# Altium PCB Peripheralboard2.PcbDoc
Units mil, origin at the board's own origin, x right, y up, seen from the top; angles counter-clockwise.
Board outline 3346.46 x 3346.46 mil, 2 copper layers (Top Layer, Bottom Layer); 19 components, 17 nets, 154 pads, 14 vias.
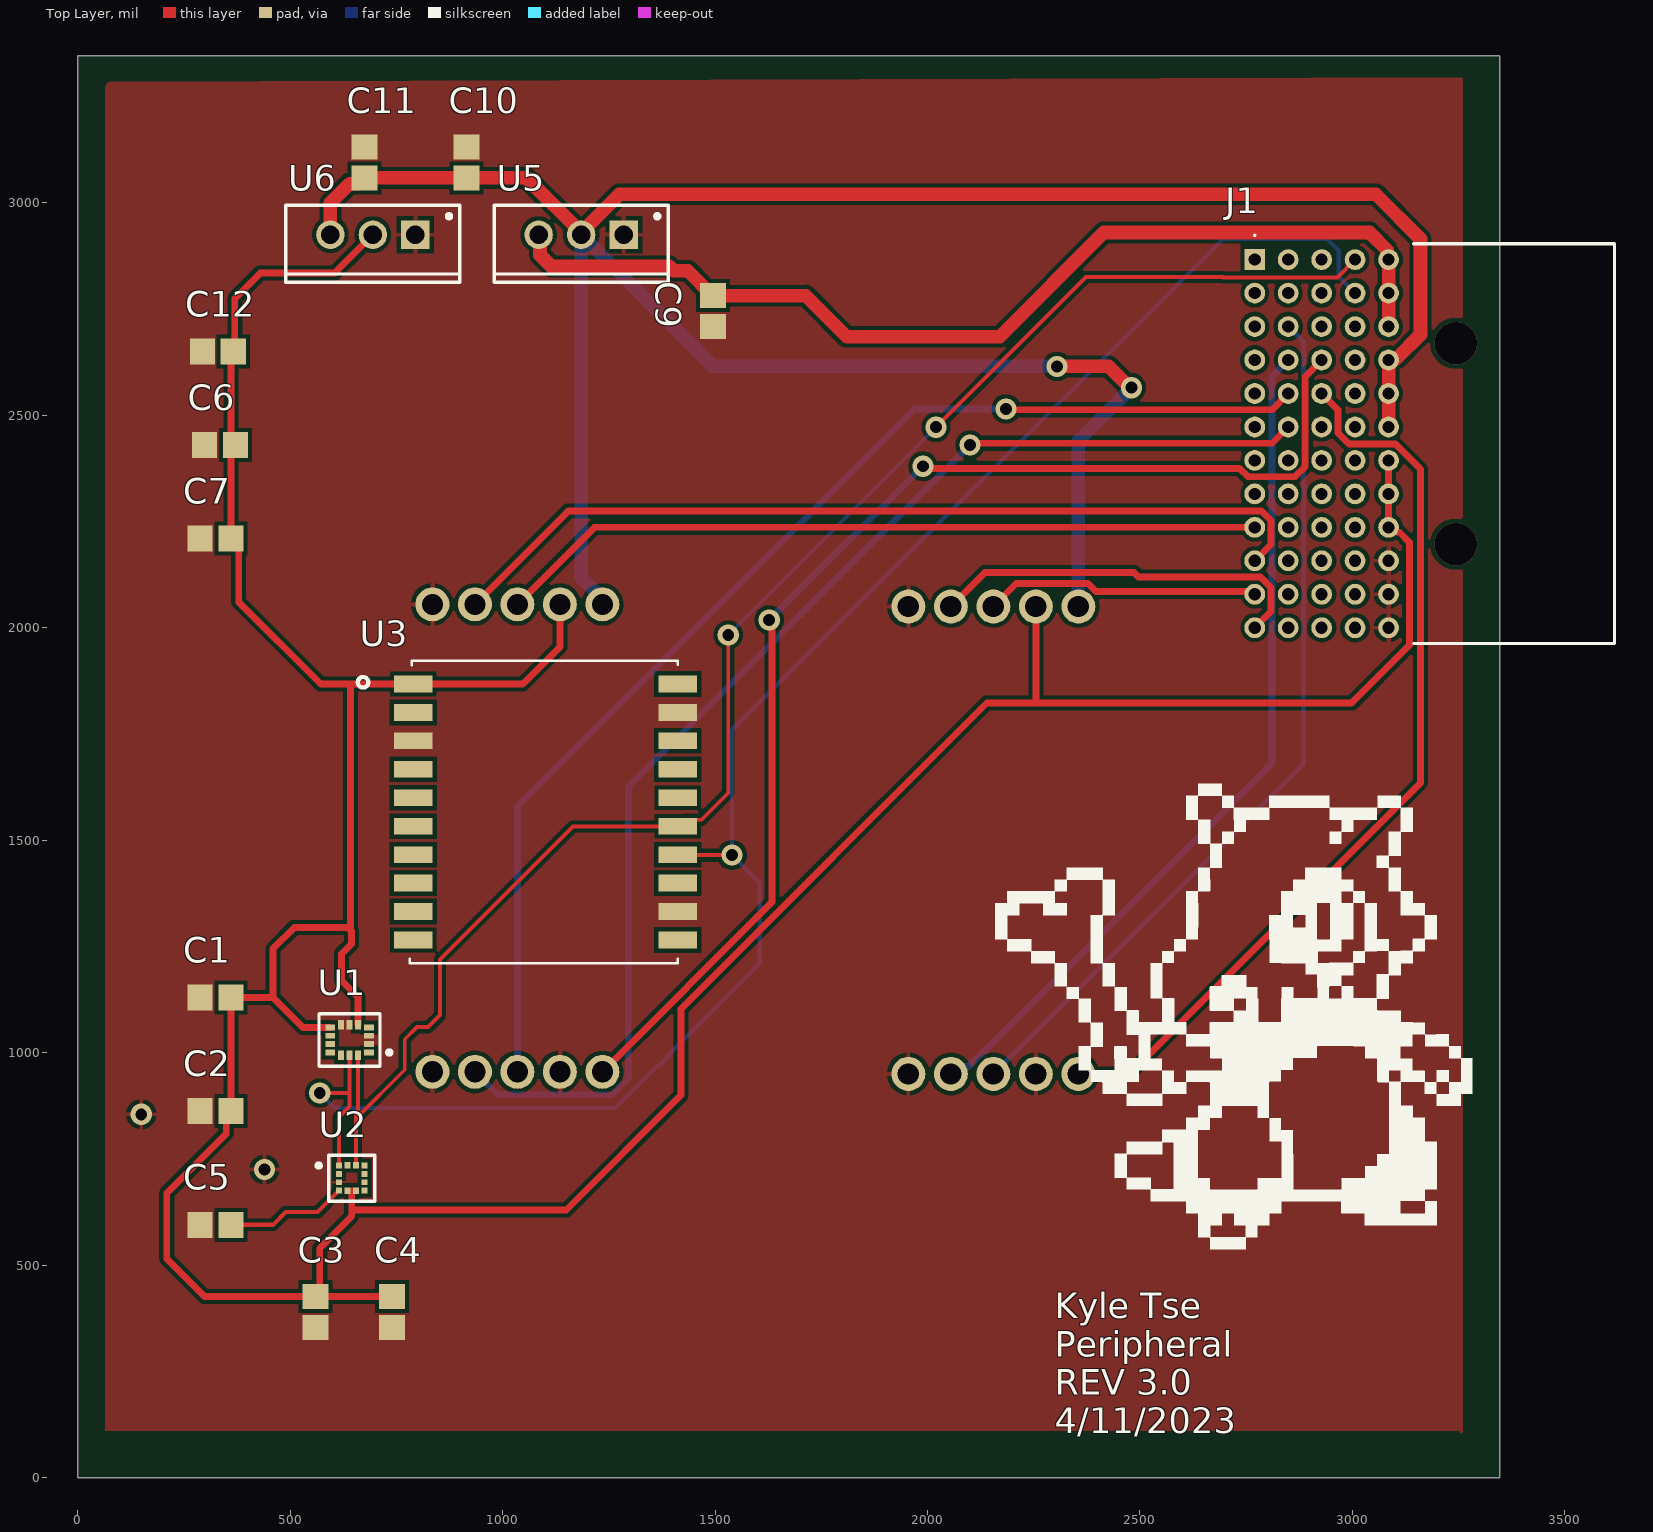
[diagram p0: Top Layer view]
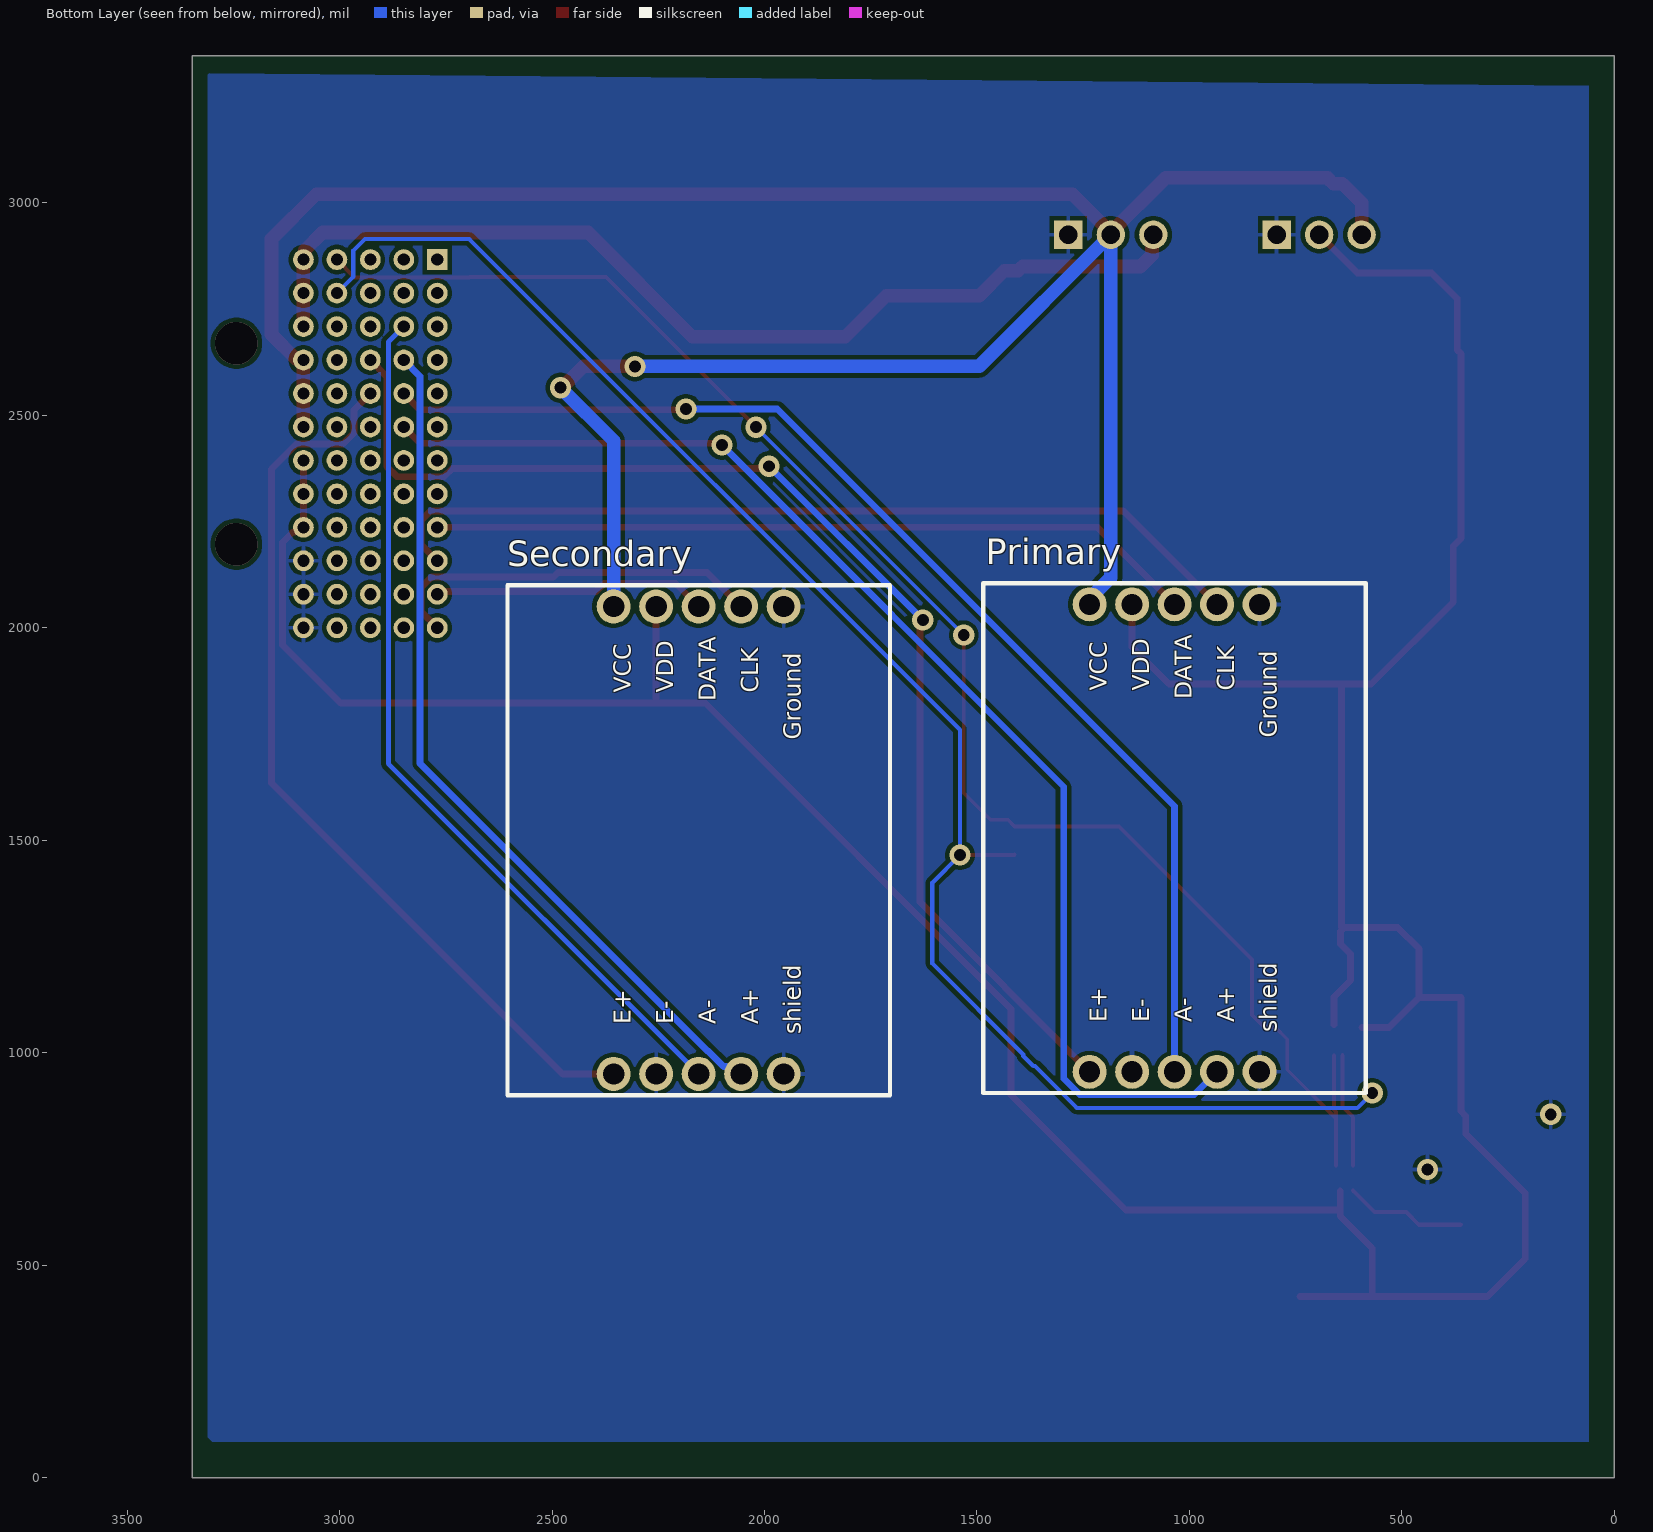
[diagram p1: Bottom Layer view, seen from below]

## Layer stack, top to bottom
Top Solder: solder mask 0.4, Solder Resist, Dk 3.5
Top Layer: signal copper 1.4
Dielectric 1: dielectric 12.6, FR-4, Dk 4.8
Bottom Layer: signal copper 1.4
Bottom Solder: solder mask 0.4, Solder Resist, Dk 3.5

## Board outline
0,0 0,3346.46 3346.46,3346.46 3346.46,0

## Design rules (kind name [scope] priority, off if disabled: settings)
Clearance [All] p1: gap=10 ignorepadtopadclearanceinfootprint=FALSE except(0: Arc-Hole Track-Hole SMDPad-Hole THPad-Hole Via-Hole Fill-Hole Poly-Hole Region-Hole Text-Hole; 3.94: Arc-SMDPad Track-SMDPad; 5.91: Arc-THPad Track-THPad SMDPad-SMDPad SMDPad-THPad THPad-THPad; 7.87: SMDPad-Text THPad-Text)
MinimumSolderMaskSliver [All] p1: minsoldermaskwidth=5.51
PolygonConnect [All] p1: thpad.connectstyle=Relief thpad.reliefconductorwidth=10 thpad.reliefentries=4 thpad.polygonreliefangle="90 Angle" thpad.airgapwidth=10 smdpad.connectstyle=Direct smdpad.reliefconductorwidth=10 smdpad.reliefentries=4 smdpad.polygonreliefangle="90 Angle" smdpad.airgapwidth=10 via.connectstyle=Relief via.reliefconductorwidth=10 via.reliefentries=4 via.polygonreliefangle="90 Angle" via.airgapwidth=10
RoutingVias [All] p1: holewidth=28 width=50 viastyle="Through Hole" minholewidth=28 minwidth=50 maxholewidth=28 maxwidth=50
SolderMaskExpansion [All] p1: expansion=4 istentingtop=FALSE
Width [All] p1: maxlimit=32 minlimit=9.21 preferedwidth=10 minimp=50.000000 maximp=50.000000 favimp=50.000000
29 further rules are at their usual default settings.

## Classes and differential pairs
component class Amplifier: Primary Secondary
component class UniConnector: J1
component class PA1616D: C6 C7 U3
component class CurrentSensor: C9 C10 C11 C12 U5 U6
component class 3+6axis: C1 C2 C3 C4 C5 U1 U2

## Components (designator, comment, footprint, x,y, rotation, side; value= is the part's Value field where it differs from the comment)
C1 "1uF" CAPC2013X145X48ML20T23 325,1130 r180 top
C2 ".1uF" CAPC2013X145X48ML20T23 325,862.5 r180 top
C3 "1uF" CAPC2013X145X48ML20T23 560,390 r270 top
C4 ".1uF" CAPC2013X145X48ML20T23 740,390 r270 top
C5 ".1uF" CAPC2013X145X48ML20T23 325,595 r0 top
C6 "1uF" CAPC2013X145X48ML20T23 335,2430 r180 top
C7 ".1uF" CAPC2013X145X48ML20T23 325,2210 r180 top
C9 "10uF" CAPC2013X145X48ML20T23 1495,2745 r270 top
C10 "10uF" CAPC2013X145X48ML20T23 915,3095 r90 top
C11 "10uF" CAPC2013X145X48ML20T23 675,3095 r90 top
C12 "10uF" CAPC2013X145X48ML20T23 330,2650 r180 top
J1 "5223004-2" 52230042 2770.04,2866.22 r90 top locked
Primary "hx711" PCBComponent_1 585,905 r90 bottom
Secondary "hx711" PCBComponent_1 1705,900 r90 bottom
U1 "LSM6DSOXTR" FP-LGA-14L-DM00249496-MFG 640,1030 r180 top
U2 "LIS3MDLTR" FP-VFLGA-12-8365767-MFG 645,705 r0 top
U3 "PA1616D" PA1616D 738.82,1241.73 r0 top
U5 "LD1117V50" TO220 1185,2925 r180 top
U6 "LD1117V33" TO220 695,2925 r180 top

## Footprints (in the part's own frame and the unit in brackets; to place one, negate y for a bottom-side part, rotate by r counter-clockwise, add the part's x,y. Pads: shape width x height; smd on the part's side, far side on the other; paste and mask are expansions set on the pad)
52230042 [mm]
  rect 1.243x1.243 hole 0.725: A1(0,0)
  round 1.243 hole 0.725: A2(-2,0) A3(-4,0) A4(-6,0) A5(-8,0) A6(-10,0) A7(-12,0) A8(-14,0) A9(-16,0) A10(-18,0) A11(-20,0) A12(-22,0) B1(0,-2) B2(-2,-2) B3(-4,-2) B4(-6,-2) B5(-8,-2) B6(-10,-2) B7(-12,-2) B8(-14,-2) B9(-16,-2) B10(-18,-2) B11(-20,-2) B12(-22,-2) C1(0,-4) C2(-2,-4) C3(-4,-4) C4(-6,-4) C5(-8,-4) C6(-10,-4) C7(-12,-4) C8(-14,-4) C9(-16,-4) C10(-18,-4) C11(-20,-4) C12(-22,-4) D1(0,-6) D2(-2,-6) D3(-4,-6) D4(-6,-6) D5(-8,-6) D6(-10,-6) D7(-12,-6) D8(-14,-6) D9(-16,-6) D10(-18,-6) D11(-20,-6) D12(-22,-6) E1(0,-8) E2(-2,-8) E3(-4,-8) E4(-6,-8) E5(-8,-8) E6(-10,-8) E7(-12,-8) E8(-14,-8) E9(-16,-8) E10(-18,-8) E11(-20,-8) E12(-22,-8)
  silkscreen extent -22.94,-21.5 1.5,0.05
CAPC2013X145X48ML20T23 [mm] "Chip Capacitor, 2-Leads, Body 2.00x1.25mm, IPC Low Density"
  rect 1.5x1.55 smd: 1(-0.925,0) 2(0.925,0)
  body extent -1.1,-0.72 1.1,0.72, height 1.45
FP-LGA-14L-DM00249496-MFG [mm]
  rect 0.575x0.35 smd paste+0 mask+0: 1(-1.162,0.75) 2(-1.162,0.25) 3(-1.162,-0.25) 4(-1.162,-0.75) 8(1.162,-0.75) 9(1.162,-0.25) 10(1.162,0.25) 11(1.162,0.75)
  rect 0.35x0.575 smd paste+0 mask+0: 5(-0.5,-0.913) 6(0,-0.913) 7(0.5,-0.913) 12(0.5,0.913) 13(0,0.913) 14(-0.5,0.913)
  silkscreen extent -2.5,-1.58 1.83,1.58, body extent -2.05,-1.8 2.05,1.8, height 0.25
FP-VFLGA-12-8365767-MFG [mm]
  rect 0.375x0.35 smd paste+0 mask+0: 1(-0.763,0.75) 2(-0.763,0.25) 3(-0.763,-0.25) 4(-0.763,-0.75) 7(0.763,-0.75) 8(0.763,-0.25) 9(0.763,0.25) 10(0.763,0.75)
  rect 0.35x0.375 smd paste+0 mask+0: 5(-0.25,-0.763) 6(0.25,-0.763) 11(0.25,0.763) 12(-0.25,0.763)
  silkscreen extent -2.1,-1.38 1.38,1.38, body extent -1.58,-1.58 1.58,1.58, height 0.25
PA1616D [mm] "GPS IC"
  rect 2.3x1 smd: 1(1.3,15.9) 2(1.3,14.2) 3(1.3,12.5) 4(1.3,10.8) 5(1.3,9.1) 6(1.3,7.4) 7(1.3,5.7) 8(1.3,4) 9(1.3,2.3) 10(1.3,0.6) 11(17.1,0.6) 12(17.1,2.3) 13(17.1,4) 14(17.1,5.7) 15(17.1,7.4) 16(17.1,9.1) 17(17.1,10.8) 18(17.1,12.5) 19(17.1,14.2) 20(17.1,15.9)
  silkscreen extent -2.02,-0.8 17.1,17.3
PCBComponent_1 [mil]
  round 80 hole 50 mask+2.5: 1(50,650) 2(50,550) 3(50,450) 4(50,350) 5(50,250) 6(1150,650) 7(1150,550) 8(1150,450) 9(1150,350) 10(1150,250)
  silkscreen extent 0,0 1200,900
TO220 [mm] "TO, Thru-Hole, Vertical, Heatsink Mounted; 3 In-Line Leads; Pitch 2.54 mm"
  rect 1.7x1.7 hole 1.1: 1(-2.54,0)
  round 1.7 hole 1.1: 2(0,0) 3(2.54,0)
  silkscreen extent -5.2,-1.75 5.2,2.85, body extent -5.25,-1.8 5.25,2.9, height 19.7

## Part data
C1 C2 C3 C4 C5 C6 C7 C9 C10 C11 C12: library part CMP-2007-03160-1, Manufacturer=Vitramon, Part Number=VJ0805Y103KXBBC31
J1: "Conn Backplane RCP 60 POS 2mm Solder RA Thru-Hole Tube", Manufacturer_Name="TE Connectivity", Mouser Part Number=571-5223004-2, Datasheet Link=https://www.te.com/commerce/DocumentDelivery/DDEController?Action=srchrtrv&DocNm=5223004&DocType=Customer+Drawing&DocLang=English, Geometry.Height=14mm, Manufacturer_Part_Number=5223004-2, Mouser Price/Stock=https://www.mouser.co.uk/ProductDetail/TE-Connectivity/5223004-2?qs=oNRo%252BTjlpTO6tP0xSX%252BI3w%3D%3D
Primary Secondary: library part Component_1
U1: library part CMP-12177-000010-1, "INEMO INERTIAL MODULE: 3D ACCELE", Manufacturer=STMicroelectronics, Max Supply Voltage=3.6V, Min Supply Voltage=1.62V, Operating Supply Current=0.55mA, Package=LGA-14L-DM00249496, Temperature="-40°C to +85°C", Temperature Range High=+85°C, Temperature Range Low=-40°C, Accel Range=2/4/8/16g, Accel Sensitivity=0.061/0.122/0.244/0.488mV/g, Automotive=No, Category=IC, ComponentLink2Description=Datasheet, ComponentLink2URL=https://www.st.com/resource/en/datasheet/lsm6dsox.pdf, Device Class L1=Sensors, Device Class L2="Motion Sensors", Device Class L3="Inertial Measurement Units (IMUs)", Digikey Description="INEMO INERTIAL MODULE: 3D ACCELE", Footprint Url=https://www.st.com/content/ccc/resource/technical/document/technical_note/73/17/9c/16/dd/96/4a/01/CD00134799.pdf/files/CD00134799.pdf/jcr:content/translations/en.CD00134799.pdf, Gyro Range=125/250/500/1000/2000°/s, Gyro Sensitivity=4.375/8.75/17.5/35/70LSB/°/s, Height=0.86mm, Lead Free=Yes, Manufacturer Part Number=LSM6DSOXTR, Mouser Description="LSM6DSOX: 3.6 V 3 Axis Accelerometer Gyroscope iNEMO Inertial Module - LGA-14L", Octopart=https://octopart.com/lsm6dsoxtr-stmicroelectronics-98102600, RoHS=TRUE, Sensor Output=I2C,SPI,Other, Sensor Type=Temperature,Accelerometer,Gyroscope
U2: library part CMP-2000-07463-2, "SENSOR MR I2C/SPI 12LGA", Manufacturer=STMicroelectronics, Max Supply Voltage=3.6V, Min Supply Voltage=1.71V, Operating Supply Current=40-270uA, Package=VFLGA-12-8365767, Temperature="-40°C to +85°C", Temperature Range High=+85°C, Temperature Range Low=-40°C, Automotive=No, Category=IC, ComponentLink2Description=Datasheet, ComponentLink2URL=https://www.st.com/resource/en/datasheet/lis3mdl.pdf, Device Class L1=Sensors, Device Class L2="Magnetic Sensors", Device Class L3=unset, Digikey Description="SENSOR MR I2C/SPI 12LGA", Footprint Url=https://www.st.com/content/ccc/resource/technical/document/technical_note/73/17/9c/16/dd/96/4a/01/CD00134799.pdf/files/CD00134799.pdf/jcr:content/translations/en.CD00134799.pdf, Height=1mm, Lead Free=Yes, Manufacturer Part Number=LIS3MDLTR, Mouser Description="Board Mount Hall Effect / Magnetic Sensors Ultra Lo-Pwr Hi Perf 3-Axis 1.9-3.6V", Octopart=https://octopart.com/lis3mdltr-stmicroelectronics-29403125, RoHS=TRUE, Sensing Method=Magnetic, Sensor Output=I2C,SPI
U5: library part CMP-0244-00472-1, "Fixed Low Drop Positive Voltage Regulator, 5V, 3-Pin TO-220", ComponentLink1Description="Manufacturer URL", ComponentLink1URL=http://www.st.com, ComponentLink2Description=Datasheet, ComponentLink2URL=http://www.st.com/internet/com/TECHNICAL_RESOURCES/TECHNICAL_LITERATURE/DATASHEET/CD00000544.pdf, ComponentLink3Description="Package Specification", ComponentLink3URL=http://www.st.com/internet/com/TECHNICAL_RESOURCES/TECHNICAL_LITERATURE/PACKAGE_INFORMATION/CD00004649.pdf, DatasheetVersion=1/11/2011, PackageDescription="TO, Thru-Hole, Vertical, Heatsink Mounted; 3 In-Line Leads; Pitch 2.54 mm", PackageReference=TO220, PackageVersion=ver3.0
U6: library part CMP-0244-00470-1, "Fixed Low Drop Positive Voltage Regulator, 3.3V, 3-Pin TO-220", ComponentLink1Description="Manufacturer URL", ComponentLink1URL=http://www.st.com, ComponentLink2Description=Datasheet, ComponentLink2URL=http://www.st.com/internet/com/TECHNICAL_RESOURCES/TECHNICAL_LITERATURE/DATASHEET/CD00000544.pdf, ComponentLink3Description="Package Specification", ComponentLink3URL=http://www.st.com/internet/com/TECHNICAL_RESOURCES/TECHNICAL_LITERATURE/PACKAGE_INFORMATION/CD00004649.pdf, DatasheetVersion=1/11/2011, PackageDescription="TO, Thru-Hole, Vertical, Heatsink Mounted; 3 In-Line Leads; Pitch 2.54 mm", PackageReference=TO220, PackageVersion=ver3.0

## Via types
v1: diameter 50, hole 28, Top Layer to Bottom Layer, 12 vias
v2: diameter 100, hole 100, Top Layer to Bottom Layer, 2 vias

## Nets (pads, with @x,y where several pads share a name; then routed paths per layer and width w, separated by ;. In a path a pad name is that pad's centre, name@x,y a point inside that pad or via, vN(x,y) a via of type N, cw(c..) or ccw(c..) an arc to the next point about the centre after c; other vN are vias at no path point)
3.3V: C1.1 C2.1 C3.1 C4.1 C6.1 C7.1 C12.1 J1.E7 J1.E8 J1.E9 Primary.7 Secondary.7 U1.5 U1.8 U2.5 U2.6 U3.1 U6.2 | length 8863.2
  Top Layer w16: U1.8 530.47,1059.53 460,1130 ; 642.5,1295 642.5,1862.93 647.28,1867.72 ; 645,675 645,630 ; U1.5 659.68,1131.49 621.09,1170.08 621.09,1232.33 644.37,1255.61 644.37,1285.63 635,1295 510,1295 460,1245 460,1130 ; U6.2 605,2835 430,2835 370.14,2775.14 370.14,2653.72 361.42,2645 C7.1 379.2,2192.22 379.2,2060.8 572.28,1867.72 647.28,1867.72 ; C4.1 C3.1@570,426.42 ; Primary.7 1135,1955 1047.72,1867.72 U3.1 647.28,1867.72 ; Secondary.7 2255,1822.72 ; J1.E7 J1.E8 J1.E9 3093.91,2236.3 3105.33,2224.88 3110.12,2224.88 3134,2201 3134,1959 2997.72,1822.72 2355,1822.72 2255,1822.72 ; 460,1130 C1.1 C2.1 350,851.08 350,810 210,670 210,515 298.58,426.42 C3.1@570,426.42 ; C3.1@570,426.42 570,540 645,615 645,630 ; 645,630 1150,630 1420,900 1420,1103.23 2139.49,1822.72 2255,1822.72
5V: C10.1 C11.1 J1.E4 J1.E5 J1.E6 Primary.6 Secondary.6 U5.2 U6.3 | length 6182.2
  Top Layer w32: U6.3 595,3000 640.06,3045.06 661.47,3045.06 C11.1 C10.1 1056.42,3058.58 1185,2930 1275,3020 3055,3020 3160,2915 3160,2690 3103.24,2633.24 3088.24,2633.24 J1.E4 J1.E5 J1.E6 ; v1(2305,2615) 2426.76,2615 2476.76,2565 v1(2480,2565)
  Bottom Layer w32: Primary.6 1235,2067.99 1185,2117.99 U5.2 1495,2615 v1(2305,2615) ; Secondary.6 2355,2440 v1(2480,2565)
8.4V: C9.1 J1.E1 J1.E2 J1.E3 U5.3 | length 2422.2
  Top Layer w32: U5.3 1088.1,2921.9 1088.1,2876.9 1115,2850 1392.72,2850 1402.88,2839.85 1435.59,2839.85 1494.02,2781.42 C9.1 1713.58,2781.42 1810,2685 2170,2685 2415,2930 3040,2930 3081.76,2888.24 3081.76,2869.46 J1.E1 J1.E2 J1.E3
GND: C1.2 C2.2 C3.2 C4.2 C5.1 C6.2 C7.2 C9.2 C10.2 C11.2 C12.2 J1.E10 J1.E11 J1.E12 Primary.2 Primary.5 Primary.10 Secondary.2 Secondary.5 Secondary.10 U1.2 U1.3 U1.6 U1.7 U2.3 U3.3 U3.12 U3.19 U5.1 U6.1
  other v1: 440,725 150,855
NetC5_2: C5.2 U2.4 | length 286.9
  Top Layer w10: C5.2 460,595 490,625 564.51,625 U2.4
NetJ1_B3: J1.B3 Secondary.3 | length 2076.2
  Bottom Layer w12: Secondary.3 2885.15,1680.15 2885.15,2672.37 J1.B3
NetJ1_B4: J1.B4 Secondary.4 | length 2023.4
  Bottom Layer w16: Secondary.4 2072.32,950 2089.69,967.37 2096.14,967.37 2132.67,1003.91 2133.91,1003.91 2810.41,1680.41 2810.41,2591.63 J1.B4
NetJ1_B5: J1.B5 Primary.3 | length 2842.8
  Top Layer w16: v1(2185,2515) 2187.11,2512.89 2810.41,2512.89 J1.B5
  Bottom Layer w16: Primary.3 1035,1580 1970,2515 v1(2185,2515)
NetJ1_B6: J1.B6 Primary.4 | length 2989
  Top Layer w16: v1(2100,2430) 2104.15,2434.15 2810.41,2434.15 J1.B6
  Bottom Layer w16: Primary.4 988.91,901.09 1257.33,901.09 1295.88,939.65 1295.88,1625.88 v1(2100,2430)
NetJ1_C4: J1.C4 Primary.1 | length 2929.5
  Top Layer w16: Primary.1 1634.45,1354.45 1634.45,2000.26 1634.01,2000.71 1634.01,2011.81 v1(1627.5,2018.31) ; v1(1989.19,2380) 1994.19,2375 2734.55,2375 2754.14,2355.41 2864.67,2355.41 2889.15,2379.88 2889.15,2591.63 J1.C4
  Bottom Layer w16: v1(1627.5,2018.31) v1(1989.19,2380)
NetJ1_C5: J1.C5 Secondary.1 | length 2164.9
  Top Layer w16: Secondary.1 2475,950 3160,1635 3160,2373.05 3100.89,2432.15 2992.36,2432.15 2965.89,2458.62 2965.89,2512.89 J1.C5
NetJ1_D1: J1.D1 U1.14 U2.11 U3.15 | length 3784.9
  Top Layer w9.21: U2.11 654.84,844.84 ; 654.84,859.6 654.84,844.84 ; 654.84,860.52 660.26,865.94 ; 659.61,866.59 659.61,994 U1.14 ; v1(1531.15,1983.03) 1531.15,1611.4 1467.9,1548.15 1427.13,1548.15 1411.41,1532.43 1165.84,1532.43 853.19,1219.77 853.19,1088.42 824.81,1060.04 798.38,1060.04 770,1031.66 770,960 654.84,844.84 ; v1(2020,2472) 2373,2825 2694.51,2825 ; 2695,2824.43 2964.47,2824.43 J1.D1
  Bottom Layer w9.21: v1(1531.15,1983.03) 2020,2471.88 v1(2020,2472)
NetJ1_D2: J1.D2 U1.13 U2.1 U3.14 | length 4271.4
  Top Layer w10: v1(570,905) 640,905 ; U2.1 614.98,848.39 640,873.41 640,905 ; U1.13 640,905 ; U3.14 1413.19,1465 v1(1540,1465)
  Bottom Layer w10: v1(570,905) 605,870 1265,870 1363.7,968.7 1367.67,968.7 1391.1,992.13 1391.1,996.1 1605,1210 1605,1400 v1(1540,1465) 1540,1760 2695,2915 2940.18,2915 2967.53,2887.65 2967.53,2826.21 J1.D2
P_LOAD_CELL_CLK: J1.A10 Primary.9 | length 2084.5
  Top Layer w16: Primary.9 1155,2275 2785.61,2275 2808.41,2252.19 2808.41,2195.93 J1.A10
P_LOAD_CELL_DATA: J1.A9 Primary.8 | length 1810.1
  Top Layer w16: Primary.8 1216.3,2236.3 J1.A9
S_LOAD_CELL_CLK: J1.A12 Secondary.9 | length 911.6
  Top Layer w16: Secondary.9 2134.91,2129.91 2485.68,2129.91 2496.4,2119.19 2783.94,2119.19 2808.41,2094.71 2808.41,2038.45 J1.A12
S_LOAD_CELL_DATA: J1.A11 Secondary.8 | length 647.8
  Top Layer w16: Secondary.8 2208.91,2103.91 2377.33,2103.91 2396.23,2085 2763.86,2085 J1.A11
pads on no net: J1.A1 J1.A2 J1.A3 J1.A4 J1.A5 J1.A6 J1.A7 J1.A8 J1.B1 J1.B2 J1.B7 J1.B8 J1.B9 J1.B10 J1.B11 J1.B12 J1.C1 J1.C2 J1.C3 J1.C6 J1.C7 J1.C8 J1.C9 J1.C10 J1.C11 J1.C12 J1.D3 J1.D4 J1.D5 J1.D6 J1.D7 J1.D8 J1.D9 J1.D10 J1.D11 J1.D12 U1.1 U1.4 U1.9 U1.10 U1.11 U1.12 U2.2 U2.7 U2.8 U2.9 U2.10 U2.12 U3.2 U3.4 U3.5 U3.6 U3.7 U3.8 U3.9 U3.10 U3.11 U3.13 U3.16 U3.17 U3.18 U3.20
copper on no net:
  other v2: 3242.48,2196.93 3242.48,2669.37

## Polygon pours and split planes (outlines as drawn)
GND on Top Layer "GND_L01_P000" (solid, pour order 0): 75,3285 65,3275 65,110 3250,110 3260,100 3260,3295
GND on Bottom Layer "GND_L02_P001" (solid, pour order 1): 60,3275 60,85 3300,85 3310,95 3310,3305

## Silkscreen, mask and mechanical layers (free items; w line width, h text height)
Top Overlay:
  drawing of 38 lines, arcs and shapes, not listed
  text "Kyle Tse / Peripheral / REV 3.0 / 4/11/2023" at 2300,105 h60
Board Outline:
  the board outline again, w12

## Text inside footprints (layer, text, board x,y; h text height)
Primary: Bottom Overlay "shield" at 795,1048.37 h40 r270; Bottom Overlay "A+" at 895,1071.68 h40 r270; Bottom Overlay "A-" at 995,1071.68 h40 r270; Bottom Overlay "E-" at 1095,1071.68 h40 r270; Bottom Overlay "E+" at 1195,1071.68 h40 r270; Bottom Overlay "VCC" at 1195,1851.68 h40 r270; Bottom Overlay "VDD" at 1095,1851.68 h40 r270; Bottom Overlay "DATA" at 995,1831.69 h40 r270; Bottom Overlay "CLK" at 895,1851.68 h40 r270; Bottom Overlay "Ground" at 795,1741.7 h40 r270
Secondary: Bottom Overlay "shield" at 1915,1043.37 h40 r270; Bottom Overlay "A+" at 2015,1066.67 h40 r270; Bottom Overlay "A-" at 2114.99,1066.67 h40 r270; Bottom Overlay "E-" at 2214.99,1066.67 h40 r270; Bottom Overlay "E+" at 2314.99,1066.67 h40 r270; Bottom Overlay "VCC" at 2314.99,1846.68 h40 r270; Bottom Overlay "VDD" at 2214.99,1846.68 h40 r270; Bottom Overlay "DATA" at 2114.99,1826.69 h40 r270; Bottom Overlay "CLK" at 2015,1846.68 h40 r270; Bottom Overlay "Ground" at 1915,1736.7 h40 r270